# Altium PCB BLDC_4(2).PcbDoc (part 2 of 2)
Units mm, origin at the board's own origin, x right, y up, seen from the top; angles counter-clockwise.
Board outline 48.4 x 75 mm, 4 copper layers (F.Cu, In1.Cu, In2.Cu, B.Cu); 132 components, 115 nets, 434 pads, 199 vias.
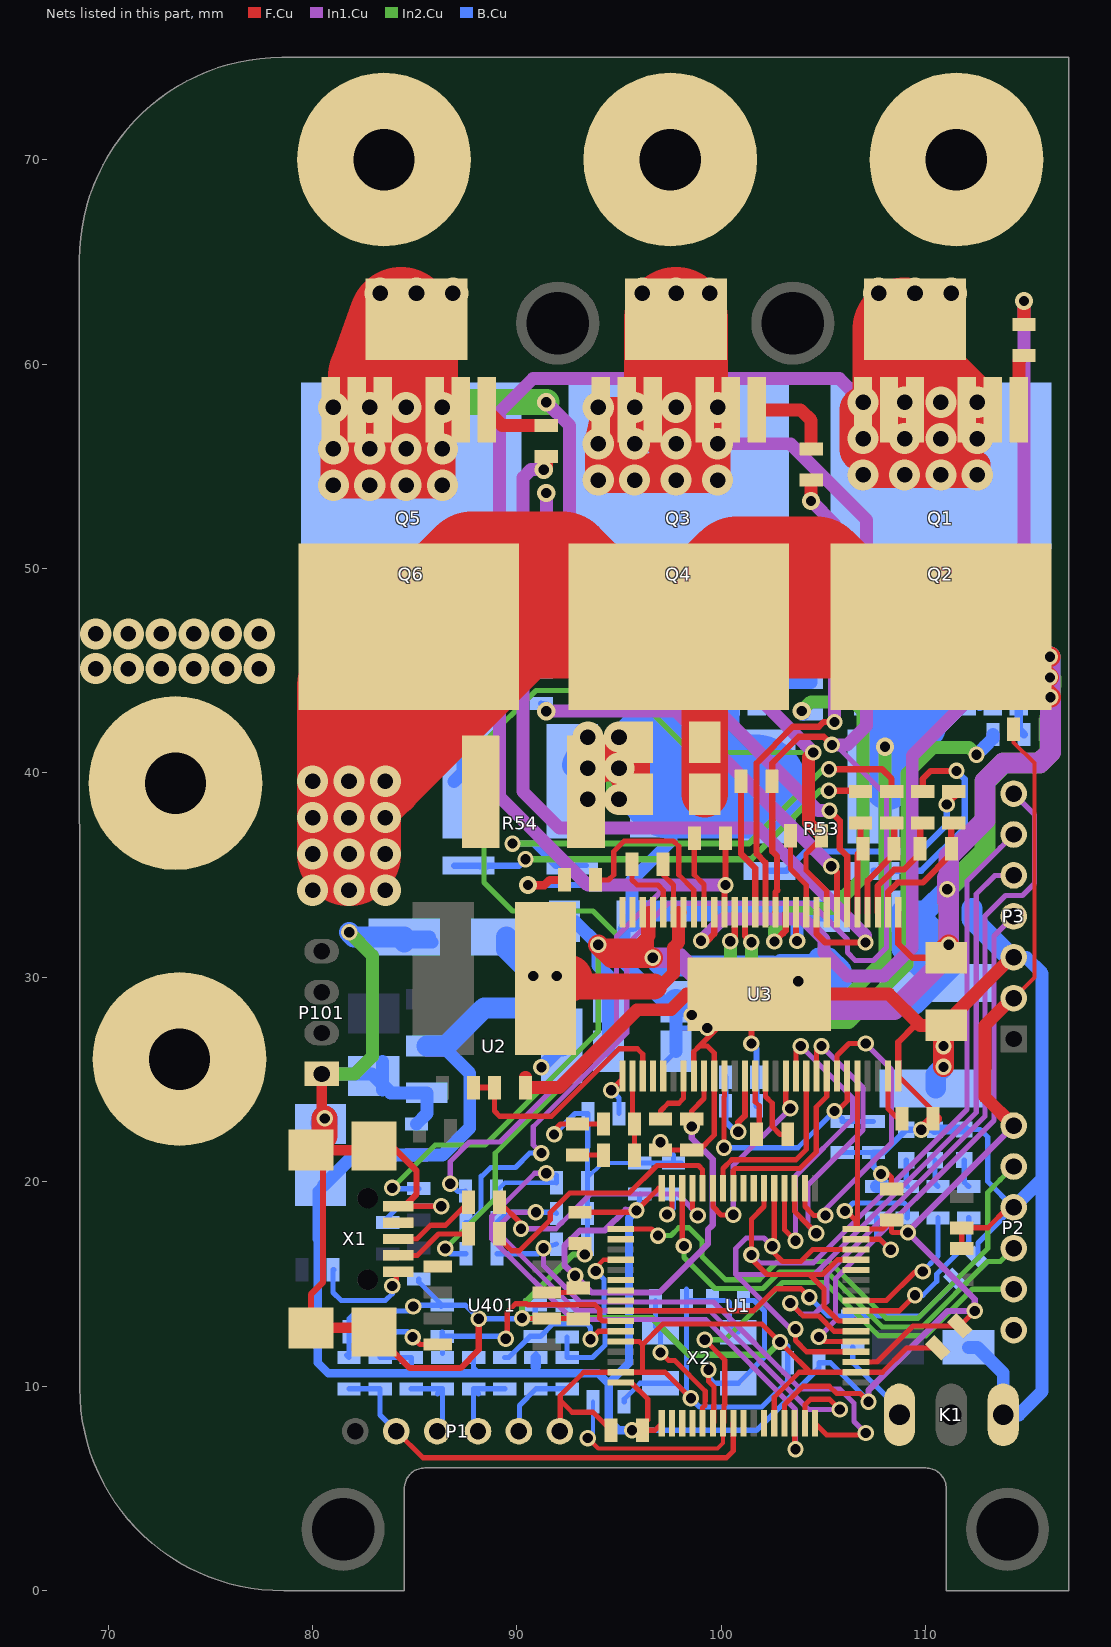
[diagram p4: the nets of this part, all layers, seen from the top]

## Via types
v1: diameter 0.8, hole 0.5, F.Cu to B.Cu, tented both sides, 115 vias
v2: diameter 1.524, hole 0.762, F.Cu to B.Cu, tented both sides, 75 vias
v3: diameter 0.889, hole 0.5, F.Cu to B.Cu, tented both sides, 9 vias

## Nets (pads, with @x,y where several pads share a name; then routed paths per layer and width w, separated by ;. In a path a pad name is that pad's centre, name@x,y a point inside that pad or via, vN(x,y) a via of type N, cw(c..) or ccw(c..) an arc to the next point about the centre after c; other vN are vias at no path point) (continued)
GND: C1.1 C2.1 C3.1 C4.1 C5.2 C6.2 C7.2 C8.1 C9.1 C10.1 C11.1 C12.1 C13.1 C14.1 C15.2 C16.2 C17.2 C18.2 C19.1 C20.1 C21.1 C23.1 C24.2 C25.2 C26.2 C31.1 C32.1 C33.2 C35.1 C37.1 C38.2 C39.1 C40.1 C41.2 C43.2 C44.2 C49.2 C51.1 C52.1 C401.2 D1.2 D2.2 D3.2 D4.1 D5.1 J5.1 K1.3 P1.6 P2.3 P3.3 P5.1 P101.1 Q4.S R2.2 R4.1 R18.2 R20.2 R21.1 R24.1 R25.1 R27.1 R33.1 R53.1 R54.2 R402.2 U1.12 U1.18 U1.60 U1.63 U2.1 U3.8 U3.10 U3.28 U3.39 U3.57 U401.2 X1.5 X2.3 | length 398.8
  F.Cu w0.203: v2(94.996,40.225) 95.758,39.971 95.758,40.098 v2(94.996,41.749)
  F.Cu w0.254: X1.5@84.1,18.8 v1(86.3,18.8) ; v1(90.255,13.329) 90.269,13.315 U401.2@91.467,13.315 92.973,13.315 C401.2@93,13.288 ; U401.2@91.5,13.35 U401.2@91.613,13.237 ; v1(91.823,22.316) 91.823,22.511 92.138,22.826 C21.1@92.964,22.826 C19.1@94.234,22.826 ; P1.6@92.101,7.8 92.123,7.822 92.123,9.316 ; C13.1@93.091,16.984 93.091,16.677 v1(93.321,16.447) ; C35.1@94.615,7.84 93.726,8.729 92.71,8.729 92.123,9.316 ; U1.60@95.087,12.186 95.984,12.186 96.139,12.031 ; v1(97.028,21.937) R20.2@97.028,21.556 C12.1@98.552,21.556 98.933,21.556 99.657,22.28 U3.10@99.657,25.176 99.657,26.293 99.314,26.636 98.933,26.636 ; v1(98.513,9.414) 97.241,10.685 96.063,10.685 ; v1(98.552,28.16) U3.57@101.854,29.176 ; U3.8@98.656,25.176 98.656,26.359 98.933,26.636 ; v1(99.314,27.525) 100.965,29.176 U3.57@101.854,29.176 ; U1.12@102.588,8.186 102.588,9.463 103.81,10.685 104.267,10.685 ; v1(107.817,20.383) 108.171,20.383 108.331,20.223 C10.1@108.331,19.651 ; U3.28@108.656,25.176 110.553,23.278 C23.1@110.553,23.08 ; C11.1@110.586,11.874 110.037,11.874 109.062,11.874 107.874,10.685 U1.18@106.589,10.685 104.267,10.685 ; R2.2@111.76,16.73 C41.2@111.76,17.746 113.03,17.746 114.031,18.747 P2.3@114.3,18.747 P2.3@114.3,18.508 ; 92.123,9.316 92.123,9.54 93.269,10.685 U1.63@95.087,10.685 96.063,10.685 ; 96.063,10.685 96.139,10.761 96.139,12.031 ; 96.139,12.031 97.155,13.047 101.981,13.047 102.47,12.558 v1(102.87,12.158) 103.27,11.758 104.267,10.761 104.267,10.685 ; 98.933,26.636 101.473,29.176 U3.57@101.854,29.176
  F.Cu w0.305: X1.5@79.925,12.85 79.925,14.486 80.518,15.079 80.518,20.957 X1.5@79.925,21.55 ; X1.5@83,12.65 84.762,10.888 87.249,10.888 88.138,11.777 v1(88.138,13.301) ; X1.5@83,21.75 83.88,21.75 85.09,20.54 85.09,19.397 84.493,18.8 X1.5@84.1,18.8 ; v1(101.473,26.763) 101.473,28.795 U3.57@101.854,29.176 ; U3.39@103.657,33.177 103.657,31.831 v1(103.709,31.779) ; U3.28@108.656,25.176 108.656,26.834 109.474,27.652 C39.1@110.998,27.652
  F.Cu w0.406: v3(90.551,34.51) 91.351,34.51 91.605,34.764 R25.1@92.329,34.764
  F.Cu w0.508: X1.5@79.925,13.325 X1.5@79.925,12.85 82.8,12.85 X1.5@83,12.65 ; X1.5@79.925,21.55 82.8,21.55 X1.5@83,21.75 ; P101.1@80.45,25.272 80.45,23.25 v1(80.6,23.1) ; R18.2@90.424,24.604 R18.2@90.424,24.776 ; v1(109.782,22.544) 110.318,23.08 C23.1@110.553,23.08
  F.Cu w0.635: R18.2@90.424,25.112 R18.2@90.424,24.604 92.075,24.604 95.885,28.414 97.536,28.414 98.298,29.176 U3.57@101.854,29.176 ; v1(98.552,28.16) 99.568,29.176 U3.57@101.854,29.176 ; P3.3@114.3,30.97 114.188,30.97 110.998,27.779 C39.1@110.998,27.652 109.728,27.652 108.204,29.176 U3.57@101.854,29.176
  F.Cu w1.016: v1(110.871,25.62) v1(110.871,26.636) 110.871,27.525 C39.1@110.998,27.652 ; C37.1@93.381,39.717 93.381,40.134 v2(94.996,41.749) 95.758,40.098 94.397,40.098 C37.1@93.381,39.717
  F.Cu w1.27: X1.5@79.925,21.55 80.6,22.225 v1(80.6,23.1) ; C37.1@93.381,39.082 93.381,38.793 v2(93.472,38.701) ; v2(93.472,40.225) C37.1@93.84,40.213 ; v2(94.996,38.701) 95.123,38.828 C1.1@95.631,38.828 ; v2(94.996,40.225) C1.1@95.631,38.828 ; C8.1@95.885,41.495 C1.1@95.885,38.955 ; C1.1@95.631,38.828 C1.1@95.885,38.955 ; C1.1@95.631,38.828 C1.1@95.885,38.955
  In1.Cu w1.27: v2(93.472,38.701) v2(93.472,40.225)
  In2.Cu w0.305: v1(93.321,16.447) 92.755,16.447 90.255,13.947 v1(90.255,13.329) 96.619,13.329 98.41,11.539 102.25,11.539 102.47,11.758 v1(102.87,12.158)
  In2.Cu w0.635: P101.1@80.45,25.272 82.075,25.272 82.931,26.128 82.931,31.069 v1(81.8,32.2)
  In2.Cu w1.27: v2(94.996,38.701) v2(94.996,40.225)
  B.Cu w0.203: R33.1@93.462,19.95 93.462,20.204 94.179,20.921 C14.1@96.012,20.921 ; v2(94.996,40.225) 95.25,40.225 v2(94.996,41.749) 95.123,41.714 v2@95.123,42.13
  B.Cu w0.254: C4.1@81.661,11.523 C4.1@81.788,11.396 R402.2@81.788,12.666 81.788,13.301 82.169,13.682 84.715,13.682 v1(84.928,13.896) 84.995,13.962 C7.2@86.35,13.962 ; C2.1@83.7,18.162 83.601,18.162 84.239,18.8 v1(86.3,18.8) ; R4.1@85.2,15.238 85.2,15.112 C7.2@86.35,13.962 ; C7.2@86.284,13.896 C7.2@86.35,13.962 ; v1(90.255,13.329) 90.838,13.329 90.9,13.391 ; v1(91.823,22.316) 92.841,23.334 R21.1@93.472,23.334 R33.1@93.462,19.95 R27.1@93.462,18.45 R24.1@93.462,16.95 93.491,16.921 93.491,16.617 v1(93.321,16.447) ; C5.2@92.456,13.936 92.43,13.962 C6.2@90.9,13.962 90.9,13.391 ; Q4.S@94.107,44.414 Q4.S@95.377,44.414 95.374,44.416 Q4.S@95.377,44.416 ; C32.1@95.25,9.237 95.25,9.364 96.032,10.147 X2.3@97.033,10.147 97.78,10.147 v1(98.513,9.414) ; C14.1@96.012,20.921 C17.2@97.663,20.921 ; v1(97.028,21.937) 97.663,21.302 C17.2@97.663,20.921 ; C49.2@97.155,25.747 C49.2@97.79,26.382 ; 97.79,27.525 v1(99.314,27.525) ; C17.2@98.044,20.921 C17.2@97.663,20.921 ; C15.2@98.298,14.748 C15.2@98.298,14.19 ; X2.3@100.833,12.646 100.4,13.079 100.4,14.1 100.31,14.19 C38.2@99.568,14.19 C15.2@98.298,14.19 ; C9.1@102.549,28.7 C9.1@102.549,28.799 ; v1(102.87,12.158) 103.06,12.158 103.251,11.968 C31.1@103.251,11.142 103.251,10.253 101.981,8.983 98.933,8.983 98.298,9.618 C15.2@98.298,14.19 ; C20.1@105.918,21.429 C52.1@107.442,21.429 ; D1.2@111.887,22.56 112.662,22.56 113.03,22.191 113.03,20.017 P2.3@114.3,18.747 112.553,17 C3.1@112.553,16.253 ; C7.2@86.35,13.962 87.477,13.962 v1(88.138,13.301) 90.81,13.301 90.9,13.391
  B.Cu w0.305: v3(90.551,34.51) 91.18,34.51 95.377,34.51 95.631,34.256 ; v1(101.473,26.763) 101.727,26.509 C26.2@101.727,25.112 C18.2@101.727,23.715 ; v1(107.817,20.383) 107.442,20.758 C52.1@107.442,21.429 107.93,21.429 D3.2@109.05,22.55 v1(109.782,22.544) 110.44,22.54 D2.2@110.45,22.55
  B.Cu w0.508: v2@95.123,42.13 95.377,40.594 v2@95.136,40.352 ; D2.2@110.45,22.55 D1.2@111.887,22.56
  B.Cu w0.635: P101.1@80.45,25.272 82.904,25.272 C33.2@83,25.176 83.826,24.35 U2.1@85.598,24.35 85.598,23.334 C24.2@85.09,22.826 ; C33.2@83.439,24.5 C33.2@83.439,25.874 ; D4.1@84.496,31.716 D4.1@85.852,31.716 ; D4.1@84.496,31.97 D4.1@85.725,31.97 ; P5.1@97.742,39.336 P5.1@97.536,39.336 97.536,36.669 95.631,34.764 95.631,34.256 C43.2@95.631,32.732 95.25,32.351 95.25,30.7 97.155,28.795 C44.2@97.79,28.795 ; C49.2@97.79,26.382 97.79,27.525 C44.2@97.79,28.795 ; v1(98.552,28.16) 97.917,28.795 C44.2@97.79,28.795 ; Q4.S@99.187,44.414 Q4.S@100.457,44.414 ; 103.124,33.24 103.709,32.655 103.709,32.344 v1(103.709,31.779) ; C16.2@107.6,19.762 107.762,19.762 107.817,19.818 v1(107.817,20.383) ; D5.1@112.093,11.904 112.522,11.904 113.792,10.634 K1.3@113.792,8.602 114.554,8.602 115.697,9.745 115.697,20.144 ; P2.3@114.3,18.747 115.697,20.144 ; P3.3@114.3,30.97 114.92,30.97 115.697,30.192 115.697,20.144
  B.Cu w0.889: Q4.S@100.457,44.414 100.457,41.241 R53.1@102.362,39.336 R53.1@102.362,40.347
  B.Cu w1.016: v1(81.8,32.2) 82.03,31.97 D4.1@84.496,31.97 ; D4.1@84.496,31.716 D4.1@84.496,31.757 ; C43.2@95.631,32.732 96.139,33.24 103.124,33.24 C40.1@105.537,33.24 ; Q4.S@96.647,44.414 96.647,43.527 99.187,40.987 P5.1@97.536,39.336 P5.1@98.361,38.511 ; C51.1@110.49,24.569 110.49,25.239 v1(110.871,25.62) v1(110.871,26.636) ; 112.268,33.367 112.268,32.859 114.158,30.97 P3.3@114.3,30.97
  B.Cu w1.27: C25.2@80.55,22.874 80.6,22.924 v1(80.6,23.1) ; R54.2@92.832,40.393 v2(93.472,41.749) ; C44.2@97.79,28.795 97.885,28.7 C9.1@102.549,28.7
  B.Cu w2.286: P5.1@97.536,39.336 99.187,40.987 Q4.S@99.187,44.414
  B.Cu w5.08: P5.1@97.028,40.987 P5.1@97.536,39.336 R53.1@101.663,39.336
  other v1: 103.759,29.811
H1: U1.43 U3.17 | length 10.1
  F.Cu w0.254: U1.43@99.588,19.687 99.588,18.783 99.99,18.381 100.018,18.381 v1(100.584,18.381) ; U3.17@103.157,25.176 103.157,23.809 v1(103.378,23.588)
  In1.Cu w0.254: v1(100.584,18.381) 100.584,18.947 100.584,20.794 v1(103.378,23.588)
H1_LOW: Q2.S R30.1 R36.1 R53.2 U3.44 | length 48.5
  F.Cu w0.305: U3.44@101.158,33.177 101.158,32.031 v1(101.473,31.716)
  In2.Cu w0.635: v1(101.473,31.716) 101.473,30.065 102.87,28.668 105.791,28.668 108.003,30.881 108.003,41.188 v3(108.003,41.275)
  B.Cu w0.254: R36.1@104.394,46.956 R30.1@104.394,48.099
  B.Cu w0.305: R36.1@104.394,46.956 105.41,46.956 106.934,45.432 Q2.S@106.934,44.414 ; R53.2@108.14,39.336 R53.2@108.267,39.463
  B.Cu w0.508: Q2.S@112.014,44.414 112.649,43.779 112.649,43.273 113.284,43.908 Q2.S@113.284,44.414
  B.Cu w0.635: v3(108.003,41.275) 108.003,40.647 108.003,39.473 R53.2@108.14,39.336 ; Q2.S@113.284,43.654 Q2.S@113.284,44.414
  B.Cu w1.27: R53.2@108.14,39.336 108.14,40.543 109.855,42.257
  B.Cu w2.286: R53.2@108.14,39.336 108.14,44.35 Q2.S@108.204,44.414 Q2.S@109.474,44.414 Q2.S@112.014,44.414 111.751,44.414 109.855,42.518 109.855,42.257
H1_VS: C28.1 J3.1 P9.1 Q1.S Q2.D R32.1 U3.46 | length 150.6
  F.Cu w0.203: v2(107.696,63.466) 108.966,62.196 P9.1@109.474,62.196 ; v2(109.474,63.466) v2(111.252,63.466)
  F.Cu w0.254: Q1.S@109.474,57.754 P9.1@109.474,62.196
  F.Cu w0.305: U3.46@100.157,33.177 100.157,34.465 v1(100.203,34.51) C28.1@100.203,36.796
  F.Cu w0.635: v2(106.934,54.576) 106.68,54.83 Q1.S@106.68,57.5 ; v2(106.934,56.354) 106.934,57.37 Q1.S@106.68,57.5 ; Q1.S@106.934,57.754 Q1.S@106.68,57.5 ; v2(106.934,58.132) 108.712,58.386 v2(108.966,58.132) ; v2(108.966,56.354) 110.49,56.1 v2(110.744,56.354) ; v2(110.744,58.132) 111.506,57.624 112.014,57.624 v2(112.522,58.132) ; v2(112.522,54.576) v2(112.522,56.354) 113.03,56.862 Q1.S@113.284,57.754 113.284,57.624 108.717,57.624 108.588,57.754 Q1.S@108.204,57.754 ; Q1.S@106.68,57.5 107.312,57.5 Q1.S@107.95,57.37 ; Q1.S@107.95,57.37 108.204,57.624 Q1.S@108.204,57.754 ; Q1.S@107.95,57.37 Q1.S@108.204,57.754
  F.Cu w1.27: v2(106.934,54.576) v2(108.966,54.576) v2(110.744,54.576) ; v2(112.522,56.354) 110.744,55.084 v2(110.744,54.576) ; v2(110.744,54.576) 111.252,55.084 112.522,55.084 v2(112.522,54.576) v2(110.744,54.576)
  F.Cu w2.286: Q1.S@106.934,57.754 106.934,55.846 107.696,55.084 109.474,55.592 112.014,57.624 Q1.S@112.014,57.754 ; v2@108.717,57.624 111.884,57.624 Q1.S@112.014,57.754 ; P9.1@109.474,62.196 108.966,61.688 112.014,58.64 Q1.S@112.014,57.754
  F.Cu w5.08: v2(108.966,58.132) P9.1@108.966,61.688
  In1.Cu w0.254: v1(86.741,19.905) 86.741,20.995 87.684,21.938 89.179,21.938 94.869,27.628 94.869,32.004 97.375,34.51
  In1.Cu w0.635: 98.367,34.51 99.637,34.51 v1(100.203,34.51) ; 98.679,34.51 97.375,34.51 93.472,34.51 89.154,38.828 89.154,57.654 90.79,59.29 105.776,59.29 v2(106.934,58.132)
  B.Cu w0.203: v2(107.696,63.466) v2(109.474,63.466)
  B.Cu w0.254: v1(86.741,19.905) 87.122,19.524 R32.1@87.488,19.55
  B.Cu w0.635: v2(106.934,54.576) v2(108.966,54.576) ; v2(106.934,56.354) 106.68,57.878 v2(106.934,58.132) ; v2(108.966,56.354) 109.22,56.608 v2(108.966,58.132) ; v2(110.744,54.576) v2(112.522,54.576) ; v2(110.744,56.354) v2(110.744,58.132) ; v2(112.522,56.354) 112.268,56.608 v2(112.522,58.132)
H2: U1.42 U3.19 | length 9
  F.Cu w0.254: U1.42@100.089,19.687 100.089,20.648 100.514,21.074 103.657,21.074 104.158,21.574 104.158,24.171 U3.19@104.158,25.176
H2_VS: C29.1 J2.1 P7.1 Q3.S Q4.D R26.1 U3.41 | length 145
  F.Cu w0.203: v2(96.139,63.466) v2(97.79,63.466) ; P7.1@97.79,62.196 98.171,62.196 v2(99.441,63.466)
  F.Cu w0.305: U3.41@102.639,33.195 U3.41@102.657,33.177 102.657,34.171 102.743,34.258 102.73,34.27 102.73,35.92 102.489,36.161 C29.1@102.489,39.59 102.489,40.467 103.791,41.768 105.01,41.768 v1(105.41,41.368)
  F.Cu w0.508: Q3.S@99.187,57.754 Q3.S@100.457,57.754
  F.Cu w0.635: v2(93.98,56.1) v2(95.758,56.1) ; Q3.S@93.98,56.354 93.726,56.608 v2(93.98,57.878) ; v2(95.758,57.878) v2(97.79,57.878) ; v2(97.79,54.322) 98.044,54.068 v2(99.822,54.322) ; v2(97.79,56.1) v2(99.822,56.1) ; v2(99.822,57.878) 100.333,57.878 Q3.S@100.457,57.754
  F.Cu w1.27: Q3.S@94.107,57.754 Q3.S@95.377,57.754 ; Q3.S@96.647,57.754 Q3.S@95.377,57.754 ; v2(97.79,56.1) 96.012,54.322 v2(95.758,54.322) ; v2(99.822,57.878) v2(99.822,56.1) ; v2(93.98,54.322) v2(93.98,56.1) 93.98,56.357 Q3.S@95.377,57.754 ; v2(93.98,54.322) v2(95.758,56.1) v2(95.758,54.322) ; v2(93.98,54.322) v2(95.758,54.322) ; v2(95.758,54.322) v2(97.79,54.322) ; v2(97.79,54.322) 99.568,56.1 v2(99.822,56.1) ; v2(97.79,54.322) v2(99.822,54.322) v2(99.822,56.1)
  F.Cu w5.08: v2(97.79,57.878) P7.1@97.79,62.196
  In1.Cu w0.254: v1(91.2,21.4) 90.8,21.8 90.8,22.694 95.377,27.271 95.377,31.589 97.396,33.609 104.407,33.609 106.172,31.843 106.172,31.208 106.553,30.827 107.442,30.827 108.077,31.462 108.077,38.885 105.994,40.968 v1@105.594,41.368
  In1.Cu w0.635: v2(99.822,56.1) 103.378,56.1 107.1,52.378 107.1,42.309 106.16,41.368 ; v1(105.41,41.368) 106.16,41.368 ; v1@105.594,41.368 106.16,41.368
  B.Cu w0.203: v2(97.79,63.466) v2(99.441,63.466)
  B.Cu w0.254: R26.1@87.503,18 87.7,18 88.25,18.55 88.25,20.267 88.291,20.267 88.724,20.7 89.934,20.7 90.634,21.4 v1(91.2,21.4)
  B.Cu w0.635: v2(93.98,54.322) 97.917,54.762 95.054,57.878 v2(93.98,57.878) ; v2(93.98,56.1) 94.234,57.878 v2(95.758,57.878) ; v2(95.758,54.322) 96.012,54.576 v2(97.79,54.322) ; v2(95.758,56.1) v2(97.79,56.1) ; v2(97.79,57.878) v2(99.822,57.878) ; v2(99.822,54.322) v2(99.822,56.1)
H3: U1.41 U3.21 | length 9.2
  F.Cu w0.254: U1.41@100.589,19.687 100.589,20.538 100.693,20.642 103.836,20.642 104.648,21.454 104.648,23.661 105.159,24.171 U3.21@105.159,25.176
H3_LOW: Q6.S R46.1 R54.1 U3.34 | length 53.5
  F.Cu w0.305: v1(105.291,38.154) 105.691,37.754 105.791,37.654 105.791,36.296 106.157,35.93 U3.34@106.157,33.177
  In1.Cu w0.635: v3(91.44,53.687) 91.44,46.575 93.535,44.48 98.4,44.48 104.726,38.154 v1(105.291,38.154)
  B.Cu w0.305: Q6.S@87.376,44.414 87.376,47.083 88.011,47.718 R46.1@91.186,47.718
  B.Cu w0.635: R54.1@86.931,39.59 87.376,40.035 Q6.S@87.376,44.414 87.376,48.099 88.519,49.242 90.17,49.242 91.44,50.512 v3(91.44,53.687)
H3_VS: C30.1 J1.1 P6.1 Q5.S Q6.D R23.1 U3.36 | length 166.9
  F.Cu w0.203: v2(83.312,63.466) v2(85.09,63.466) ; v2(86.868,63.466) P6.1@87.376,63.466
  F.Cu w0.254: C30.1@104.902,36.923 104.902,36.796 104.14,36.034 104.14,35.239 105.159,34.22 U3.36@105.159,33.177
  F.Cu w0.508: Q5.S@80.899,57.754 Q5.S@82.169,57.754 85.725,57.754 Q5.S@86.995,57.754 ; v2(81.026,57.878) v2(82.804,57.878) ; v2(84.582,54.068) 84.836,54.322 v2(86.36,54.068) ; v2(84.582,57.878) v2(86.36,57.878)
  F.Cu w0.635: v1(104.5,41) 104.267,40.767 104.267,37.558 C30.1@104.902,36.923
  F.Cu w1.27: v2(84.582,57.878) 85.087,57.373 86.36,57.373 Q5.S@85.979,57.754 ; v2(81.026,55.846) v2(82.804,54.068) ; v2(81.026,55.846) v2(82.804,55.846) ; v2(81.026,55.846) v2(81.026,54.068) v2(82.804,54.068) ; v2(82.804,54.068) v2(82.804,55.846) ; v2(82.804,54.068) v2(84.582,54.068) ; v2(82.804,55.846) v2(84.582,54.068) ; v2(84.582,54.068) v2(86.36,54.068) ; v2(84.582,54.068) v2(84.582,55.846) ; v2(84.582,55.846) v2(86.36,55.846) ; v2(84.582,55.846) 86.36,57.624 v2(86.36,57.878) v2(86.36,55.846) ; v2(84.582,55.846) v2(86.36,54.068) ; v2(86.36,54.068) v2(86.36,55.846)
  F.Cu w2.286: P6.1@85.09,62.196 85.979,61.307 Q5.S@85.979,57.754
  F.Cu w5.08: Q5.S@83.185,57.754 83.312,57.878 83.312,59.402 P6.1@84.328,62.196
  In1.Cu w0.635: v3(91.44,58.132) 92.583,56.989 92.583,47.083 94.107,45.559 99.941,45.559 104.1,41.4 v1(104.5,41)
  In2.Cu w0.254: v1(86.5,16.733) 88.943,19.176 88.943,21.394 94.869,27.319 94.869,32.097 93.726,33.24 89.789,33.24 88.392,34.637 88.392,41.495 90.932,44.035 95.504,44.035 98.539,41 v1(104.5,41)
  In2.Cu w1.27: v2(86.36,57.878) 86.614,58.132 v3(91.44,58.132)
  B.Cu w0.203: v2(85.09,63.466) v2(86.868,63.466)
  B.Cu w0.254: v1(86.5,16.733) 86.757,16.476 R23.1@87.503,16.476
  B.Cu w0.508: v2(81.026,54.068) 80.772,55.084 81.026,55.338 Q6.D@84.836,55.016 86.614,56.794 v2(86.36,57.878) ; v2(81.026,55.846) v2(81.026,57.878) ; v2(82.804,54.068) 83.058,53.814 v2(84.582,54.068) ; v2(82.804,55.846) v2(84.582,55.846) ; v2(82.804,57.878) v2(84.582,57.878) ; v2(86.36,54.068) v2(86.36,55.846)
HALL1_IN: P1.3 R8.1 R13.1 | length 4
  B.Cu w0.254: R13.1@84.836,9.872 R8.1@86.36,9.872 ; P1.3@86.099,7.8 86.36,8.061 R8.1@86.36,9.872 ; R8.1@86.121,9.634 R8.1@86.36,9.872
HALL1_OUT: C7.1 R8.2 U1.58 | length 11.9
  F.Cu w0.254: v1(89.453,12.323) 89.529,12.398 89.529,13.624 89.941,14.036 90.468,14.036 90.523,13.981 93.82,13.981 94.05,13.75 94.05,13.32 94.183,13.187 U1.58@95.087,13.187
  B.Cu w0.254: C7.1@86.35,12.438 89.338,12.438 v1(89.453,12.323) ; C7.1@86.35,12.638 R8.2@86.36,11.596
HALL2_IN: P1.4 R9.1 R12.1 | length 4
  B.Cu w0.254: P1.4@88.101,7.8 87.884,8.017 R12.1@87.884,9.872 ; R12.1@88.123,9.634 R12.1@87.884,9.872 ; R9.1@89.408,9.872 R12.1@87.884,9.872
HALL2_OUT: C6.1 R9.2 U1.59 | length 7.4
  F.Cu w0.254: v1(93.605,12.3) 93.992,12.687 U1.59@95.087,12.687
  B.Cu w0.254: R9.2@89.408,11.396 89.604,11.396 90.646,12.438 C6.1@90.9,12.438 91.154,12.438 91.766,13.05 93.421,13.05 ; v1(93.605,12.3) 93.605,12.866 ; 93.421,13.05 93.605,12.866 ; 93.421,13.05 93.605,12.866
HALL3_IN: P1.5 R10.1 R11.1 | length 3.9
  B.Cu w0.254: P1.5@90.1,7.8 90.122,9.062 R11.1@90.932,9.872 R10.1@92.456,9.872
HALL3_OUT: C5.1 R10.2 U1.52 | length 8.5
  F.Cu w0.203: v1(93.859,15.631) 93.859,15.812 94.234,16.187 U1.52@95.087,16.187
  B.Cu w0.254: C5.1@92.456,12.412 R10.2@92.456,11.396 93.707,11.396 94.31,12 94.31,12.639 94.259,12.689 94.259,15.231 v1(93.859,15.631)
L1: U1.36 U3.18 | length 16.1
  F.Cu w0.254: U1.36@103.088,19.687 103.088,17.655 v1(103.632,17.111) ; U3.18@103.657,25.176 103.657,26.408 v1(103.886,26.636)
  In1.Cu w0.254: v1(103.632,17.111) 103.632,20.286 106.426,23.08 106.426,24.096 104.286,26.236 v1(103.886,26.636)
L2: U1.35 U3.20 | length 15.5
  F.Cu w0.254: U1.35@103.589,19.687 103.589,18.538 104.243,17.884 v1(104.643,17.484) ; U3.20@104.658,25.176 104.658,26.393 v1(104.902,26.636)
  In1.Cu w0.254: v1(104.643,17.484) 104.243,17.884 104.243,19.846 106.934,22.537 106.934,24.604 v1(104.902,26.636)
L3: U1.34 U3.22 | length 15
  F.Cu w0.254: U1.34@104.089,19.687 104.089,18.783 104.519,18.353 104.525,18.353 v1(105.091,18.353) ; U3.22@105.656,25.176 105.656,26.18 106.239,26.763 106.495,26.763 v1(107.061,26.763)
  In1.Cu w0.254: v1(105.091,18.353) 105.091,18.654 108.331,21.894 108.331,25.493 v1(107.061,26.763)
LED_GREEN: R37.2 U1.24 | length 8.3
  F.Cu w0.254: U1.24@106.589,13.687 108.717,13.687 109.074,14.044 v1(109.474,14.444)
  B.Cu w0.254: v1(109.474,14.444) 109.855,14.444 110.542,15.131 110.542,15.481 112.1,17.04 R37.2@112.1,18.238
LED_RED: R38.2 U1.25 | length 6.8
  F.Cu w0.254: U1.25@106.589,14.185 108.072,14.185 109.474,15.587 109.824,15.587 v1(109.849,15.612)
  B.Cu w0.254: v1(109.849,15.612) 110.249,16.012 110.6,16.363 R38.2@110.6,18.238
M_H1: R28.2 U3.47 | length 49.8
  F.Cu w0.305: v1(99.012,31.789) 99.324,31.789 99.657,32.121 U3.47@99.657,33.177
  F.Cu w0.635: R28.2@114.808,61.942 v3(114.808,63.085)
  In1.Cu w0.635: v1(99.012,31.789) 100.083,32.859 104.013,32.859 105.029,31.843 105.029,31.208 106.172,30.065 107.95,30.065 109.341,31.456 109.341,40.833 114.808,46.3 114.808,62.457 v3(114.808,63.085)
M_H2: R34.2 U3.42 | length 24.4
  F.Cu w0.305: U3.42@102.156,33.177 102.156,35.605 101.727,36.034 101.727,40.479 103.505,42.257 104.775,42.257 105.011,42.493 v1(105.538,42.493)
  F.Cu w0.635: v3(104.394,53.306) R34.2@104.394,54.322
  In1.Cu w0.635: v3(104.394,53.306) 105.538,52.163 105.538,43.059 v1(105.538,42.493)
M_H3: R42.2 U3.37 | length 40.9
  F.Cu w0.305: U3.37@104.658,33.177 104.658,32.121 105.073,31.707 106.486,31.707 v1(107.051,31.707)
  F.Cu w0.635: v3(91.313,54.83) 91.44,54.957 R42.2@91.44,55.465
  In1.Cu w0.635: v3(91.313,54.83) 90.684,54.83 90.297,54.443 90.297,39.082 92.075,37.304 101.799,37.304 107.051,32.052 v1(107.051,31.707)
M_L1: R29.2 U3.45 | length 28.9
  F.Cu w0.305: v1(100.442,31.765) 100.658,31.981 U3.45@100.658,33.177
  In2.Cu w0.635: v1(100.442,31.765) 100.442,29.659 102.321,27.779 106.244,27.779 109.093,30.628 109.093,39.971 110.363,41.241 112.125,41.241 v1(112.483,40.884)
  B.Cu w0.635: v1(112.483,40.884) 112.883,41.284 113.284,41.684 R29.2@113.284,41.876
M_L2: R35.2 U3.40 | length 19.3
  F.Cu w0.305: v1(102.597,31.755) 102.997,32.155 103.037,32.155 103.157,32.275 U3.40@103.157,33.177
  In2.Cu w0.635: v1(102.597,31.755) 102.597,32.321 103.643,33.367 105.41,33.367 106.934,34.891 106.934,43.019 106.477,43.477 104.382,43.477 v3(103.938,43.032)
  B.Cu w0.635: v3(103.938,43.032) 103.938,42.968 R35.2@104.013,42.892
M_L3: R43.2 U3.35 | length 20
  F.Cu w0.305: v1(105.383,35.431) 105.656,35.158 U3.35@105.656,33.177
  In1.Cu w0.635: v3(91.44,43.019) 97.795,43.019 104.983,35.831 v1(105.383,35.431)
  B.Cu w0.305: R43.2@91.186,43.4 91.44,43.345 v3(91.44,43.019)
MISO_RX_SCL: P3.7 U1.22 | length 36
  F.Cu w0.254: v1(103.378,14.063) 103.778,13.663 104.013,13.428 104.775,13.428 105.517,12.687 U1.22@106.589,12.687
  In1.Cu w0.254: v1(103.378,14.063) 103.778,13.663 103.905,13.536 104.56,13.536 105.156,14.133 105.156,15.46 112.903,23.207 112.903,33 113.905,34.002 114.73,34.002 115.316,34.588 115.316,37.97 P3.7@114.3,38.986
Net-(C21-Pad2): C21.2 R19.1 | length 1.3
  F.Cu w0.254: C21.2@92.964,21.302 R19.1@94.234,21.302
Net-(D1-A): D1.1 R37.1 | length 1.4
  B.Cu w0.254: D1.1@111.887,21.061 111.887,19.975 R37.1@112.1,19.762
Net-(D2-A): D2.1 R38.1 | length 1.4
  B.Cu w0.254: D2.1@110.45,21.051 110.45,19.912 R38.1@110.6,19.762
Net-(D3-A): D3.1 R22.1 | length 1.3
  B.Cu w0.254: D3.1@109.05,21.051 109.05,19.812 R22.1@109.1,19.762
Net-(D4-K): C27.1 D4.2 L1.1 U3.50 U3.51 | length 18.9
  F.Cu w0.254: C27.1@97.155,35.526 97.155,35.018 97.658,34.515 U3.51@97.658,33.177
  F.Cu w0.305: U3.51@97.658,33.177 97.917,33.177 U3.50@98.158,33.177
  F.Cu w0.635: L1.1@91.399,29.938 L1.1@91.399,29.979 ; 96.709,29.557 97.028,29.557 97.663,30.192 97.663,31.462 97.917,31.716 97.917,33.177
  F.Cu w1.016: v1(90.805,30.065) 90.932,29.938 L1.1@91.399,29.938 91.821,29.938 v1(91.948,30.065)
  F.Cu w1.27: L1.1@91.399,29.938 92.562,29.938 92.943,29.557 96.709,29.557
  F.Cu w2.286: L1.1@91.399,29.938 L1.1@92.562,29.938
  B.Cu w1.016: D4.2@89.494,31.97 89.494,31.376 v1(90.805,30.065) v1(91.948,30.065)
Net-(K1-P1): K1.1 R5.2 | length 4.2
  B.Cu w0.254: R5.2@106.426,11.904 106.426,11.142 108.712,8.856 K1.1@108.712,8.602
Net-(Q1-PadG): Q1.G R28.1 | length 2.8
  F.Cu w0.635: Q1.G@114.554,57.754 114.554,60.164 R28.1@114.808,60.418
Net-(Q2-PadG): Q2.G R29.1 R30.2 | length 16.2
  B.Cu w0.254: R30.2@104.394,49.623 111.379,49.623 114.554,46.448 Q2.G@114.554,44.414
  B.Cu w0.406: Q2.G@114.554,44.414 114.554,42.13 R29.1@114.808,41.876
Net-(Q3-PadG): Q3.G R34.1 | length 4.3
  F.Cu w0.635: Q3.G@101.727,57.754 103.883,57.754 104.394,57.243 R34.1@104.394,55.846
Net-(Q4-PadG): Q4.G R35.1 R36.2 | length 3.7
  B.Cu w0.635: Q4.G@101.727,44.414 101.73,44.416 R35.1@104.394,44.416 R36.2@104.394,45.432
Net-(Q5-PadG): Q5.G R42.1 | length 3.2
  F.Cu w0.635: Q5.G@88.519,57.754 89.284,56.989 R42.1@91.44,56.989
Net-(Q6-PadG): Q6.G R43.1 R46.2 | length 4
  B.Cu w0.305: R43.1@91.186,44.924 R46.2@91.186,46.194
  B.Cu w0.635: Q6.G@88.646,44.414 89.157,44.924 R43.1@91.186,44.924
Net-(R6-Pad1): R6.1 X1.1 | length 5.5
  F.Cu w0.254: v1(83.9,14.9) 84.1,15.1 X1.1@84.1,15.6
  B.Cu w0.254: R6.1@81.05,15.7 R6.1@81.012,15.7 81.012,14.585 81.407,14.19 83.566,14.19 83.9,14.524 v1(83.9,14.9)
Net-(R103-Pad2): R103.2 X1.2 | length 4
  F.Cu w0.254: X1.2@84.1,16.4 85.124,16.4 86.162,17.438 87.054,17.438 87.067,17.45 R103.2@87.638,17.45
Net-(R104-Pad2): R104.2 X1.3 | length 4.3
  F.Cu w0.254: X1.3@84.1,17.2 85.104,17.2 85.773,17.869 86.507,17.869 R104.2@87.638,19
Net-(U1-PH0-OSC_IN): C15.1 U1.5 X2.1 | length 7.2
  F.Cu w0.254: v1(97.028,11.65) 97.428,11.25 97.719,11.25 99.217,9.752 99.217,9.274 99.202,9.259 99.202,9.06 99.088,8.946 U1.5@99.088,8.186
  B.Cu w0.254: C15.1@96.774,14.19 96.774,12.905 X2.1@97.033,12.646 97.028,12.641 v1(97.028,11.65)
Net-(U1-PH1-OSC_OUT): C38.1 U1.6 X2.2 | length 10
  F.Cu w0.254: v1(99.375,10.808) 99.375,10.243 99.649,9.968 99.649,9.095 99.634,9.08 99.634,8.231 U1.6@99.588,8.186
  B.Cu w0.254: v1(99.375,10.808) 99.375,10.45 99.678,10.147 X2.2@100.833,10.147 102.108,11.422 102.108,13.682 101.6,14.19 C38.1@101.092,14.19
Net-(U1-VCAP1): C16.1 U1.31 | length 3.8
  F.Cu w0.254: U1.31@106.589,17.188 107.769,17.188 107.887,17.07 v1(108.287,16.67)
  B.Cu w0.254: C16.1@107.6,18.238 107.6,17.357 107.887,17.07 v1(108.287,16.67)
Net-(U1-VCAP2): C17.1 U1.47 | length 2.5
  F.Cu w0.254: v1(97.35,18.4) 97.587,18.686 U1.47@97.587,19.687
  B.Cu w0.254: v1(97.35,18.4) 97.663,18.713 C17.1@97.663,19.397
Net-(U3-AVDD): C23.2 U3.27 | length 2.3
  F.Cu w0.254: U3.27@108.158,25.176 108.158,23.571 C23.2@108.648,23.08
Net-(U3-BIAS): R25.2 U3.49 | length 9.2
  F.Cu w0.254: R25.2@93.853,34.764 94.488,34.764 94.742,35.018 94.742,36.161 95.25,36.669 97.663,36.669 97.917,36.415 97.917,35.018 98.656,34.279 U3.49@98.656,33.177
Net-(U3-BST_A): C28.2 U3.48 | length 3.8
  F.Cu w0.254: C28.2@98.679,36.796 98.679,35.018 99.157,34.541 U3.48@99.157,33.177
Net-(U3-BST_B): C29.2 U3.43 | length 6.7
  F.Cu w0.305: C29.2@100.965,39.59 100.965,36.034 101.658,35.341 U3.43@101.658,33.177
Net-(U3-BST_BK): C27.2 U3.52 | length 3.6
  F.Cu w0.254: C27.2@95.631,35.526 95.631,34.764 95.885,34.51 96.901,34.51 97.158,34.254 U3.52@97.158,33.177
Net-(U3-BST_C): C30.2 U3.38 | length 4.1
  F.Cu w0.254: C30.2@103.378,36.923 103.378,36.098 103.378,35.295 104.158,34.516 U3.38@104.158,33.177
Net-(U3-COMP): C19.2 R19.2 U3.2 | length 3.9
  F.Cu w0.254: U3.2@95.656,25.176 95.656,22.928 C19.2@95.758,22.826 R19.2@95.758,21.302
Net-(U3-CP1): C22.1 U3.14 | length 3
  F.Cu w0.254: U3.14@101.658,25.176 101.658,23.911 101.854,23.715 101.854,22.445 C22.1@101.727,22.318
Net-(U3-CP2): C22.2 U3.15 | length 3.5
  F.Cu w0.254: U3.15@102.156,25.176 102.156,24.175 102.489,23.842 102.489,22.699 102.87,22.318 C22.2@103.251,22.318
Net-(U3-DTC): R20.1 U3.7 | length 2.9
  F.Cu w0.254: R20.1@97.028,23.08 97.028,23.461 97.409,23.842 97.917,23.842 98.158,24.084 U3.7@98.158,25.176
Net-(U3-DVDD): C20.2 C52.2 U3.11 U3.23 | length 13.9
  F.Cu w0.254: v1(100.132,21.666) 100.132,22.232 100.127,22.237 100.127,24.141 100.157,24.171 U3.11@100.157,25.176 ; v1(105.537,23.461) 105.664,23.461 106.157,23.954 U3.23@106.157,25.176
  B.Cu w0.254: v1(100.132,21.666) 100.698,21.666 103.742,21.666 v1(105.537,23.461) 105.918,23.08 C20.2@105.918,22.953 C52.2@107.442,22.953
Net-(U3-GVDD): C18.1 C26.1 U3.13 | length 5.9
  F.Cu w0.305: v1(100.832,22.445) 100.832,22.906 101.158,23.233 U3.13@101.158,25.176
  B.Cu w0.305: C26.1@100.203,25.112 C18.1@100.203,23.715 100.203,22.953 100.711,22.445 v1(100.832,22.445)
Net-(U3-RT_CLK): R21.2 U3.1 | length 2.2
  F.Cu w0.254: v1(94.615,24.477) 95.159,25.021 U3.1@95.159,25.176
  B.Cu w0.254: v1(94.615,24.477) 94.996,24.096 R21.2@94.996,23.334
Net-(U3-SN1): C34.1 R48.2 U3.33 | length 4.5
  F.Cu w0.305: U3.33@106.657,33.177 106.657,36.011 C34.1@106.934,36.288 106.807,36.415 R48.2@106.807,37.558
Net-(U3-SN2): C36.1 R50.2 U3.31 | length 5.6
  F.Cu w0.305: U3.31@107.658,33.177 107.658,34.472 108.458,35.272 108.925,35.272 109.728,36.075 C36.1@109.728,36.288 109.728,37.431 R50.2@109.855,37.558
Net-(U3-SP1): C34.2 R49.2 U3.32 | length 5
  F.Cu w0.305: U3.32@107.158,33.177 107.158,34.734 108.458,36.034 C34.2@108.458,36.288 108.458,37.431 R49.2@108.331,37.558
Net-(U3-SP2): C36.2 R51.2 U3.30 | length 6.4
  F.Cu w0.305: U3.30@108.158,33.177 108.158,34.174 108.622,34.637 109.855,34.637 111.252,36.034 C36.2@111.252,36.288 111.252,37.431 R51.2@111.379,37.558
Net-(U3-VSENSE): R17.2 R18.1 U3.3 | length 12.1
  F.Cu w0.254: R18.1@88.9,24.604 88.9,23.461 89.154,23.207 91.694,23.207 94.996,26.509 95.885,26.509 96.157,26.238 U3.3@96.157,25.176
  F.Cu w0.305: R17.2@87.884,24.604 R18.1@88.9,24.604
Net-(U401-Rs): R402.1 U401.8 | length 3.1
  F.Cu w0.254: v1(84.9,12.4) 85.255,12.045 U401.8@86.133,12.045
  B.Cu w0.254: R402.1@83.312,12.666 84.634,12.666 v1(84.9,12.4)
NRST: C32.2 P2.5 U1.7 | length 32.6
  F.Cu w0.203: v1(93.472,7.459) 93.98,6.951 99.822,6.951 100.089,7.218 U1.7@100.089,8.186
  F.Cu w0.254: v1(99.187,12.269) 100.168,11.287 100.168,9.114 100.134,9.08 100.134,8.231 U1.7@100.089,8.186
  In2.Cu w0.254: v1(99.187,12.269) 100.187,12.269 102.997,15.079 105.078,15.079 107.694,12.463 110.006,12.463 112.289,14.747 113.38,14.747 P2.5@114.3,14.747
  B.Cu w0.203: v1(93.472,7.459) 93.726,7.713 C32.2@93.726,9.237
RX_SCL_MOSI: P3.6 U1.23 U1.29 U1.38 | length 41.6
  F.Cu w0.254: U1.38@102.088,19.687 102.088,18.783 101.473,18.168 101.473,16.904 101.473,16.759 v1(101.473,16.422) 101.473,16.222 102.235,15.46 104.123,15.46 ; U1.23@106.543,13.233 U1.23@106.589,13.187 105.74,13.187 105.029,13.898 105.029,14.747 104.315,15.46 104.123,15.46 ; U1.29@106.589,16.187 105.684,16.187 104.958,15.46 104.377,15.46 104.123,15.46
  In1.Cu w0.254: v1(101.473,16.422) 101.873,16.022 104.496,16.022 112.014,23.54 112.014,34.701 113.65,36.337 P3.6@114.3,36.987
SCK_ADC_EXT: P3.4 U1.21 | length 26.4
  F.Cu w0.254: v1(104.775,12.412) 105.001,12.186 U1.21@106.589,12.186
  In1.Cu w0.254: v1(104.775,12.412) 105.588,13.225 105.588,15.257 113.335,23.004 113.335,32.019 113.65,32.334 P3.4@114.3,32.984
SENS1: R23.2 R24.2 U1.16 | length 26.3
  F.Cu w0.254: U1.16@104.587,8.186 105.156,7.617 106.964,7.617 v1(107.061,7.713)
  In1.Cu w0.254: v1(91.3,16.75) 91.3,15.9 93.081,14.119 99.615,14.119 103.865,9.869 105.794,9.869 106.497,9.166 106.497,8.277 v1(107.061,7.713)
  B.Cu w0.254: R23.2@89.027,16.476 91.026,16.476 v1(91.3,16.75) R24.2@91.938,16.95
SENS2: R26.2 R27.2 U1.15 | length 28.6
  F.Cu w0.254: U1.15@104.089,8.186 104.089,9.09 104.364,9.364 105.285,9.364 v1(105.792,8.857)
  In1.Cu w0.254: v1(90.932,18.508) 89.789,18.508 89.281,18 89.281,17.309 92.902,13.688 99.436,13.688 104.266,8.857 v1(105.792,8.857)
  B.Cu w0.254: R26.2@89.027,18 89.535,18.508 v1(90.932,18.508) 91.88,18.508 R27.2@91.938,18.45
SENS3: R32.2 R33.2 U1.14 | length 30.2
  F.Cu w0.254: U1.14@103.589,8.186 103.589,6.958 v1(103.632,6.915)
  In1.Cu w0.254: v1(91.44,20.413) 90.874,20.413 88.773,18.312 88.773,17.206 92.723,13.256 99.243,13.256 103.632,8.867 v1(103.632,6.915)
  B.Cu w0.203: R32.2@89.012,19.55 89.412,19.95 R33.2@91.938,19.95
  B.Cu w0.254: v1(91.44,20.413) 91.938,20.331 R33.2@91.938,19.95
SERVO: C3.2 R5.1 U1.57 | length 18.1
  F.Cu w0.254: U1.57@95.087,13.687 101.578,13.687 102.659,14.768 103.899,14.768 103.911,14.757 v1(104.311,14.357)
  B.Cu w0.254: v1(104.311,14.357) 104.711,13.957 105.239,13.428 R5.1@106.426,13.428 107.251,13.428 109.728,13.428 C3.2@111.475,15.176
SH1_A: R48.1 R54.3 | length 24
  F.Cu w0.305: v1@105.313,39.082 v1(105.264,39.131) 106.758,39.131 R48.1@106.807,39.082
  In2.Cu w0.305: v1(90.424,35.78) 101.473,35.78 104.824,39.131 v1(105.264,39.131)
  B.Cu w0.254: R54.3@86.931,35.463 88.456,35.463 R54.3@88.519,35.399
  B.Cu w0.305: R54.3@86.931,35.463 87.82,35.463 R54.3@88.519,35.399 ; R54.3@87.63,35.463 90.106,35.463 v1(90.424,35.78)
SH1_B: R49.1 R54.4 | length 25
  F.Cu w0.305: v1(105.266,40.175) 107.861,40.175 108.331,39.705 R49.1@108.331,39.082
  In2.Cu w0.305: v1(89.789,36.542) 101.346,36.542 105.029,40.225 105.216,40.225 v1(105.266,40.175)
  B.Cu w0.254: R54.4@92.634,35.463 R54.4@93.408,35.463
  B.Cu w0.305: v1(89.789,36.542) 90.805,36.542 91.885,35.463 R54.4@92.71,35.463
SH2_A: R50.1 R53.4 | length 10.7
  F.Cu w0.305: R50.1@109.855,39.082 109.855,39.705 110.249,40.098 110.94,40.098 v1(111.506,40.098)
  B.Cu w0.305: R53.4@107.442,35.209 109.791,35.209 111.906,37.323 111.906,39.698 v1(111.506,40.098)
SH2_B: R51.1 R53.3 | length 11.4
  F.Cu w0.305: v1(111.03,38.454) 111.43,38.854 111.43,39.032 R51.1@111.379,39.082
  B.Cu w0.305: R53.3@102.362,35.209 103.188,35.209 104.14,36.161 109.728,36.161 111.03,37.463 v1(111.03,38.454)
SWCLK: P2.2 U1.49 | length 27.2
  F.Cu w0.254: U1.49@95.087,17.685 96.581,17.685 v1(96.901,17.365)
  In2.Cu w0.254: v1(96.901,17.365) 97.536,17.365 97.917,17.746 98.425,17.746 99.06,17.111 99.06,16.349 100.203,15.206 101.854,15.206 102.743,16.095 105.283,16.095 108.052,13.327 109.626,13.327 113.03,16.73 113.03,19.476 113.65,20.096 P2.2@114.3,20.746
SWDIO: P2.4 U1.46 | length 23.2
  F.Cu w0.254: U1.46@98.087,19.687 98.087,16.941 v1(98.171,16.857)
  In2.Cu w0.254: v1(98.171,16.857) 98.171,16.292 99.688,14.775 102.033,14.775 102.846,15.587 105.18,15.587 107.873,12.895 109.827,12.895 113.027,16.095 113.65,16.095 P2.4@114.3,16.746
TEMP_MOTOR: C4.2 P1.2 R7.1 U1.8 | length 22.4
  F.Cu w0.254: P1.2@84.1,7.8 85.404,6.496 100.256,6.496 100.589,6.829 U1.8@100.589,8.186
  B.Cu w0.254: C4.2@81.788,9.872 R7.1@83.312,9.872 83.312,8.589 P1.2@84.1,7.8
TX_SDA: P3.5 U1.20 U1.30 U1.37 | length 47.1
  F.Cu w0.203: v1@102.489,16.603 v1(102.489,16.844)
  F.Cu w0.254: v1@102.489,16.603 102.997,16.095 103.886,16.095 104.478,16.687 U1.30@106.589,16.687 ; v1(102.489,16.844) 102.489,17.111 102.588,17.21 U1.37@102.588,19.687 ; v1(103.632,12.793) 103.632,12.228 104.174,11.686 105.684,11.686 U1.20@106.589,11.686
  In1.Cu w0.254: v1(102.489,16.844) 102.089,17.244 101.225,17.244 100.711,16.73 100.711,15.968 100.711,15.46 ; v1(103.632,12.793) 103.378,12.793 100.711,15.46 ; P3.5@114.3,34.985 113.381,34.985 112.471,34.076 112.471,23.386 104.545,15.46 100.711,15.46
  B.Cu w0.406: P3.5@114.3,34.7 P3.5@114.3,34.97
unconnected-(P2-Pad6): P2.6
unconnected-(U1-PA15(JTDI)-Pad50): U1.50
unconnected-(U1-PB2-BOOT1-Pad28): U1.28
unconnected-(U1-PB3(JTDO{slash}TRACESWO)-Pad55): U1.55
unconnected-(U1-PB4(NJTRST)-Pad56): U1.56
unconnected-(U1-PC1(ADC123_IN11)-Pad9): U1.9
unconnected-(U1-PC3(ADC123_IN13)-Pad11): U1.11
unconnected-(U1-PC8-Pad39): U1.39
unconnected-(U1-PC9-Pad40): U1.40
unconnected-(U1-PC13_(RTC_AF1)-Pad2): U1.2
unconnected-(U1-PC14-OSC32_IN-Pad3): U1.3
unconnected-(U1-PC15-OSC32_OUT-Pad4): U1.4
unconnected-(U1-PD2-Pad54): U1.54
unconnected-(U3-EN_BUCK-Pad55): U3.55
unconnected-(U3-OCTW-Pad5): U3.5
unconnected-(U3-PWRGD-Pad4): U3.4
unconnected-(U3-SS_TR-Pad56): U3.56
unconnected-(U401-Vref-Pad5): U401.5
unconnected-(X1-Pad4): X1.4
USB_DM: R103.1 U1.44 | length 13.3
  F.Cu w0.254: R103.1@89.162,17.45 89.162,17.196 89.734,16.625 90.125,16.625 91.637,18.137 91.637,18.492 92.591,19.446 95.499,19.446 96.848,20.794 98.885,20.794 99.088,20.591 U1.44@99.088,19.687
USB_DP: R104.1 U1.45 | length 13
  F.Cu w0.254: R104.1@89.162,19 90.2,17.962 v1(90.2,17.7) ; U1.45@98.588,19.687 98.588,18.727 v1(98.85,18.35)
  In1.Cu w0.254: v1(90.2,17.7) 91.9,17.7 92.2,18 92.2,17.998 93.599,19.397 97.917,19.397 v1(98.85,18.35)
V_SUPPLY: C1.2 C8.2 C9.2 C37.2 C39.2 C40.2 C43.1 C44.1 C49.1 C51.2 J4.1 P4.1 Q1.D Q3.D Q5.D R3.1 U3.29 U3.53 U3.54 | length 290.3
  F.Cu w0.305: U3.54@96.157,33.177 96.329,33.177 96.393,33.113 96.456,33.177 U3.53@96.657,33.177 ; U3.29@108.656,33.177 108.656,31.645 109.347,30.954 C39.2@110.998,30.954
  F.Cu w0.406: C39.2@110.922,31.335 C39.2@110.998,30.954
  F.Cu w0.635: v2(80.01,36.034) v2(80.01,37.812) ; v2(80.01,39.59) 85.852,45.94 85.852,46.956 Q5.D@84.709,47.152 ; v2(81.788,36.034) v2(83.566,36.034) ; v2(81.788,37.812) v2(83.566,37.812) ; v2(81.788,39.59) v2(83.566,39.59) ; v1(93.98,31.589) 96.012,31.589 96.456,32.034 96.456,33.177 ; 96.393,33.113 96.393,31.208 v1(96.647,30.954) ; Q1.D@110.744,47.152 Q1.D@111.056,47.152
  F.Cu w0.889: Q1.D@110.744,47.152 113.596,47.152 v1(116.078,44.67)
  F.Cu w1.016: C37.2@88.229,39.082 C37.2@88.229,39.118 ; v1(93.98,31.589) 94.615,30.954 v1(96.647,30.954) ; C39.2@110.998,30.954 110.922,31.386 v1(111.125,31.589) ; Q1.D@111.31,47.152 Q1.D@110.744,47.152 ; v1(116.078,45.686) 112.21,45.686 Q1.D@110.744,47.152 ; v1(116.1,43.7) 112.648,47.152 Q1.D@110.744,47.152
  F.Cu w1.27: Q3.D@97.917,47.152 99.187,45.882 C8.2@99.187,41.495 C1.2@99.187,38.955
  F.Cu w2.286: v2(83.566,39.59) v2@84.074,39.082 ; Q3.D@97.917,47.152 99.187,45.882 C1.2@99.187,38.955
  F.Cu w5.08: v2(81.788,36.034) 81.788,44.231 Q5.D@84.709,47.152 ; v2(81.788,37.812) 81.788,38.828 90.112,47.152 Q3.D@97.917,47.152 ; Q5.D@84.709,47.152 87.815,50.258 92.202,50.258 95.308,47.152 Q3.D@97.917,47.152 ; Q5.D@84.709,47.152 Q3.D@97.917,47.152 ; Q3.D@97.917,47.152 107.5,47.152 104.648,50.004 100.769,50.004 Q3.D@97.917,47.152
  In1.Cu w1.016: v1(96.647,30.954) 97.917,30.954 100.457,28.414 108.458,28.414 111.125,31.081 v1(111.125,31.589) 111.125,33.547 ; v1(116.078,45.686) v1(116.078,44.67) 116.078,43.722 v1(116.1,43.7) 116.1,41.009 115.57,40.479 113.792,40.479 112.903,39.59 112.903,37.685 111.125,35.907 111.125,35.085 ; 111.125,33.547 111.125,33.667 111.05,33.742 v1(111.05,34.308) 111.05,34.874 111.125,34.949 111.125,35.085 ; 111.125,33.547 111.125,35.085
  In2.Cu w0.254: v1(83.9,19.7) 86.005,21.805 88.438,21.805 93.98,27.347 v1(93.98,31.589)
  In2.Cu w1.016: v1(111.125,31.589) 111.125,33.058 ; v1(116.078,45.686) v1(116.078,44.67) 116.123,44.625 116.123,44.289 116.1,44.266 v1(116.1,43.7) 116.1,42.763 116.078,42.741 116.078,40.987 115.57,40.479 113.817,40.479 112.903,39.566 112.903,36.161 112.014,35.273 ; 111.125,33.058 111.125,33.667 111.05,33.742 v1(111.05,34.308) 112.014,35.273 ; 111.125,33.058 111.125,34.383 112.014,35.273
  B.Cu w0.254: v1(83.9,19.7) 83.938,19.662 R3.1@85.2,19.662
  B.Cu w0.635: v2(80.01,36.034) v2(81.788,36.034) ; v2(80.01,37.812) v2(81.788,37.812) ; C43.1@92.329,32.732 92.837,32.732 v1(93.98,31.589) 93.98,30.573 94.488,30.065 C44.1@94.488,28.795 C49.1@94.488,26.382 ; v1(96.647,30.954) 97.047,30.554 ; 102.616,30.573 102.87,30.827 104.657,30.827 104.775,30.946 ; 105.257,30.946 105.851,30.351 C9.2@105.851,28.7
  B.Cu w0.889: 112.268,35.526 112.903,36.161 112.903,39.59 113.792,40.479 115.57,40.479 116.1,41.009 v1(116.1,43.7)
  B.Cu w1.016: v1(96.647,30.954) 97.047,30.554 102.489,30.554 ; 104.775,30.946 105.257,30.946 105.851,30.351 C9.2@105.851,28.7 109.47,28.7 C51.2@110.49,29.72 ; C51.2@111.201,30.431 C51.2@110.49,29.72 ; 112.268,35.526 v1(111.05,34.308) 109.982,33.24 ; v1(116.078,45.686) v1(116.078,44.67) 116.1,44.648 v1(116.1,43.7) ; C40.2@108.839,33.24 108.839,31.371 C51.2@110.49,29.72 ; C40.2@108.839,33.24 108.839,32.732 110.236,31.335 110.49,31.081 C51.2@110.49,29.72 ; C40.2@108.839,33.24 109.982,33.24 ; 109.982,33.24 109.982,32.732 v1(111.125,31.589) 111.125,30.355 C51.2@110.49,29.72
  other v2: 80.01,34.256 81.788,34.256 83.566,34.256 69.4,45.1 71,45.1 72.6,45.1 74.2,45.1 75.8,45.1 77.4,45.1 69.4,46.8 71,46.8 72.6,46.8 74.2,46.8 75.8,46.8 77.4,46.8
VCC: C10.2 C11.2 C12.2 C13.2 C14.2 C24.1 C25.1 C31.2 C35.2 C401.1 P2.1 P3.2 R1.1 R7.2 R11.2 R12.2 R13.2 R22.2 U1.1 U1.13 U1.19 U1.32 U1.48 U1.64 U2.2 U3.9 U3.24 U401.3 | length 185.2
  F.Cu w0.203: P3.2@114.3,28.971 115.316,29.987 115.316,40.479 114.3,41.495 R1.1@114.3,42.13
  F.Cu w0.254: U401.3@91.467,14.585 92.773,14.585 C401.1@93,14.812 93,15.25 v1(92.85,15.4) ; C13.2@93.218,18.635 C13.2@93.091,18.508 95.758,18.508 v1(95.85,18.6) 96.937,19.687 U1.48@97.089,19.687 ; U1.64@95.087,10.187 95.588,10.187 96.4,9.375 96.4,8.355 96.139,8.094 C35.2@96.139,7.84 96.744,7.84 U1.1@97.089,8.186 ; v1(95.631,7.84) C35.2@95.885,7.586 ; C12.2@98.552,23.08 98.552,23.461 99.157,24.066 U3.9@99.157,25.176 ; U1.13@103.088,8.186 103.088,9.09 103.998,9.999 105.283,9.999 105.644,9.638 106.801,9.638 v1(107.201,9.238) ; v1(106.045,18.567) 106.11,18.567 106.589,18.089 U1.32@106.589,17.685 ; U1.19@106.589,11.186 107.612,11.186 109.378,12.951 111.115,12.951 C11.2@111.664,12.951 v1(112.395,13.682) ; U3.24@106.657,25.176 106.657,17.754 U1.32@106.589,17.685 ; v1(109.135,17.515) 108.569,17.515 108.372,17.515 108.331,17.556 C10.2@108.331,18.127 107.889,17.685 U1.32@106.589,17.685
  F.Cu w0.508: v1(98.552,22.699) C12.2@98.552,23.08
  F.Cu w0.635: P2.1@114.3,22.748 112.903,24.145 112.903,27.652 114.221,28.971 P3.2@114.3,28.971
  In1.Cu w0.305: v1(95.85,18.6) 95.319,18.635 94.303,17.619 93.091,17.619 92.329,16.857 92.329,15.921 v1(92.85,15.4) 93.674,14.577 96.971,14.577 99.346,16.951 99.346,17.651 99.58,17.886 99.58,21.105 98.552,22.134 v1(98.552,22.699) ; v1(107.201,9.238) 107.201,9.804 111.079,13.682 111.829,13.682 v1(112.395,13.682) 112.395,14.248 112.395,14.255 v1(109.135,17.515) 109.135,17.583 P2.1@114.3,22.748
  B.Cu w0.254: R7.2@83.312,11.396 R13.2@84.836,11.396 84.836,10.888 85.09,10.634 ; R12.2@87.884,11.396 87.884,10.888 88.138,10.634 90.805,10.634 90.932,10.961 R11.2@90.932,11.596 ; v1(95.631,7.84) 101.727,7.84 104.775,10.888 C31.2@104.775,11.142 105.346,11.142 107.201,9.288 v1(107.201,9.238) ; v1(95.85,18.6) 95.977,18.727 C14.2@96.012,19.397 ; v1(106.045,18.567) 106.445,18.967 108.942,18.967 109.1,18.81 R22.2@109.1,18.238
  B.Cu w0.406: 80.264,17.2 80.264,11.142 80.772,10.634 85.09,10.634 88.138,10.634 90.932,10.634 ; 90.805,10.634 90.932,10.634 ; v1(95.631,7.84) 94.996,7.84 94.488,8.348 94.488,10.126 ; v1(95.85,18.6) 95.485,18.235 95.485,11.123 94.488,10.126 ; 90.932,10.634 93.98,10.634 94.488,10.126
  B.Cu w0.508: 80.264,17.2 80.264,19.54 C25.1@80.55,19.826 ; 90.932,10.961 R11.2@90.932,11.396
  B.Cu w0.635: C25.1@80.55,19.826 82.026,21.302 C24.1@85.09,21.302 86.36,21.302 87.695,22.638 87.695,25.305 86.364,26.636 U2.2@85.598,26.636 ; v1(91.2,25.6) 92.202,26.602 U2.2@92.202,26.636
  B.Cu w1.016: U2.2@85.598,26.636 86.536,26.636 88.4,28.5 90.338,28.5 U2.2@92.202,26.636
pads on no net: 1PIN.1 X1.Un1 X1.Un2

## Polygon pours and split planes (outlines as drawn)
H2_VS on F.Cu "F.Cu-/Mosfet driver/H2_VS" (solid, remove dead copper, pour order 29): 98.933,48.607 95.25,45.559 91.8,45.5 91.821,59.275 93.345,59.275 94.869,60.799 94.869,64.99 100.584,64.99 100.584,60.799 100.965,59.275 104.267,59.275 104.267,48.607
V_SUPPLY on F.Cu "F.Cu-V_SUPPLY" (solid, remove dead copper, pour order 28): 89.027,36.415 89.027,42.765 78.2,42.7 78.2,47.7 68.504,47.7 68.504,36.315
GND on F.Cu "F.Cu-GND-1" (solid, remove dead copper, pour order 27): 92.583,42.638 96.52,42.638 96.52,38.066 94.869,38.066 93.599,36.796 92.583,36.796
H1_VS on F.Cu "F.Cu-/Mosfet driver/H1_VS" (solid, remove dead copper, pour order 26): 117,50.961 104.6,50.961 104.648,59.275 106.68,59.275 106.68,64.99 117,65
H3_VS on F.Cu "F.Cu-/Mosfet driver/H3_VS" (solid, remove dead copper, pour order 25): 91.3,45.5 78.5,45.5 78.5,65 88.392,64.99 88.392,59.275 91.313,59.275
GND on F.Cu "F.Cu-GND" (solid, remove dead copper, pour order 23): 116.986,5.935 78.486,5.935 78.486,34.935 116.986,34.935
GND on In1.Cu "In1.Cu-GND-1" (solid, remove dead copper, pour order 34): 117,6 78.5,6 78.5,35 117,35
GND on In1.Cu "In1.Cu-GND" (solid, remove dead copper, pour order 33): 92.71,42.511 95.758,42.511 95.758,37.939 92.71,37.939
H1_VS on In1.Cu "In1.Cu-/Mosfet driver/H1_VS" (solid, remove dead copper, pour order 32): 117,45.5 113.919,45.432 110.871,48.607 104.648,48.607 104.648,59.275 106.68,59.275 106.68,64.99 117,65
H2_VS on In1.Cu "In1.Cu-/Mosfet driver/H2_VS" (solid, remove dead copper, pour order 31): 95.25,45.559 91.8,45.5 91.821,59.275 94.869,59.275 94.869,64.99 100.584,64.99 100.584,59.275 104.267,59.275 104.267,48.607 98.933,48.607
H3_VS on In1.Cu "In1.Cu-/Mosfet driver/H3_VS" (solid, remove dead copper, pour order 30): 91.3,45.5 78.5,45.5 78.5,65 88.392,64.99 88.392,59.275 91.313,59.275
H3_VS on In2.Cu "In2.Cu-/Mosfet driver/H3_VS" (solid, remove dead copper, pour order 39): 91.3,45.5 78.5,45.5 78.5,65 88.392,64.99 88.392,59.275 91.313,59.275
GND on In2.Cu "In2.Cu-GND-1" (solid, remove dead copper, pour order 38): 117,6 78.5,6 78.5,35 117,35
H2_VS on In2.Cu "In2.Cu-/Mosfet driver/H2_VS" (solid, remove dead copper, pour order 37): 104.267,45.559 91.8,45.5 91.821,59.275 94.869,59.275 94.869,64.99 100.584,64.99 100.584,59.275 104.267,59.275 104.267,48.607
H1_VS on In2.Cu "In2.Cu-/Mosfet driver/H1_VS" (solid, remove dead copper, pour order 36): 117,45.5 104.648,45.559 104.648,48.607 104.648,59.275 106.68,59.275 106.68,64.99 117,65
GND on In2.Cu "In2.Cu-GND" (solid, remove dead copper, pour order 35): 92.71,42.511 95.758,42.511 95.758,37.939 92.71,37.939
H2_VS on B.Cu "B.Cu-/Mosfet driver/H2_VS" (solid, remove dead copper, pour order 46): 95.377,48.607 91.927,48.548 91.821,59.275 94.869,59.275 94.869,74.99 100.584,74.99 100.584,59.275 104.267,59.275 104.267,48.607 98.933,48.607
V_SUPPLY on B.Cu "B.Cu-V_SUPPLY" (solid, remove dead copper, pour order 24): 68.5,47.7 68.5,33 78.2,33.1 78.2,47.7
GND on B.Cu "B.Cu-GND" (solid, remove dead copper, pour order 45): 117,6 78.5,6 78.5,12 68.5,12 68.5,31 78.5,31 78.5,35 94.996,35.018 94.996,36.923 92.71,36.923 92.71,47.845 100.838,47.845 100.838,42.003 101.727,42.003 101.727,36.923 100.33,36.923 100.33,35.018 117,35
H3_VS on B.Cu "B.Cu-/Mosfet driver/H3_VS" (solid, remove dead copper, pour order 44): 91.3,48.548 78.5,48.548 78.5,75 88.392,74.99 88.392,59.275 91.313,59.275
H1_VS on B.Cu "B.Cu-/Mosfet driver/H1_VS" (solid, remove dead copper, pour order 43): 117,45.5 113.919,45.432 110.871,48.607 104.648,48.607 104.648,59.275 106.68,59.275 106.68,74.99 117,75
H3_LOW on B.Cu "B.Cu-/Mosfet driver/H3_LOW" (solid, remove dead copper, pour order 42): 86.487,36.796 84.582,36.796 84.582,39.971 83.947,40.606 79.375,40.606 79.375,47.972 87.376,47.972 87.376,40.987 87.503,40.987
H1_LOW on B.Cu "B.Cu-/Mosfet driver/H1_LOW" (solid, remove dead copper, pour order 41): 113.411,42.892 112.649,42.892 112.649,42.257 110.363,39.971 110.363,37.685 109.22,36.542 106.426,36.542 106.426,47.845 110.871,47.845 113.411,45.305
VCC on B.Cu "B.Cu-VCC" (solid, remove dead copper, pour order 40): 93.3,23.9 84.2,23.9 84.2,29.7 93.3,29.7

## Keep-outs
Edge.Cuts:
  lines w0: 68.6,65.1 cw(c78.5,65.1) 78.5,75 117,75 117,0 111,0 111,5 ccw(c110,5) 110,6 85.5,6 ccw(c85.5,5) 84.5,5 84.5,0 78.6,0 cw(c78.518,9.9) 68.618,9.9 68.6,65.1
  lines w0.254: 68.6,65.1 cw(c78.5,65.1) 78.5,75 117,75 117,0 111,0 111,5 ccw(c110,5) 110,6 85.5,6 ccw(c85.5,5) 84.5,5 84.5,0 78.6,0 cw(c78.518,9.9) 68.618,9.9 68.6,65.1

## Silkscreen, mask and mechanical layers (free items; w line width, h text height)
F.SilkS:
  text "5v" at 84.45,31.212 h0.6 r90
  text "CANH" at 84.45,28.371 h0.6 r90
  text "CANL" at 84.45,25.599 h0.6 r90
  text "GND" at 84.45,23.585 h0.6 r90
  text "Benjamin Vedder" at 110.949,11.294 h1 r90
  text "VESC 4.12" at 109.235,9.676 h1 r90
  text "GND" at 113.924,5.824 h1
B.SilkS:
  text "vedder.se" at 87.7,60.266 h1.27
  text "MISO" at 112.337,40.74 h0.6 r90
  text "ADC2" at 116.401,40.296 h0.6 r90
  text "MOSI" at 112.337,38.207 h0.6 r90
  text "SCL" at 113.48,37.81 h0.6 r90
  text "RX" at 116.401,37.667 h0.6 r90
  text "SDA" at 113.48,35.804 h0.6 r90
  text "NSS" at 112.337,35.791 h0.6 r90
  text "TX" at 116.401,35.604 h0.6 r90
  text "ADC" at 116.401,33.916 h0.6 r90
  text "SCK" at 112.337,33.648 h0.6 r90
  text "GND" at 116.45,31.916 h0.6 r90
  text "3.3V" at 116.45,29.907 h0.6 r90
  text "5v" at 116.45,27.589 h0.6 r90
  text "3.3v" at 116.45,23.75 h0.6 r90
  text "CLK" at 116.45,21.653 h0.6 r90
  text "GND" at 116.45,19.716 h0.6 r90
  text "DIO" at 116.45,17.509 h0.6 r90
  text "RST" at 116.45,15.684 h0.6 r90
  text "5v" at 82.688,6.05 h0.6
  text "TEMP" at 85.235,6.05 h0.6
  text "H1" at 86.604,6.05 h0.6
  text "H2" at 88.733,6.05 h0.6
  text "H3" at 90.733,6.05 h0.6
  text "GND" at 93.016,6.05 h0.6
F.Mask:
  dashed: 106.68,51.02 106.68,44.67 103.124,44.67 103.124,52.544 104.902,52.544
  dashed: 94.234,51.02 94.234,43.4 92.71,43.4 92.71,44.924 90.932,44.924 89.662,43.654 89.662,52.798 92.456,52.798
  dashed: 88.9,36.415 84.074,36.415 84.074,33.748 79.375,33.748 79.375,43.273 88.9,43.273
  dashed: 87.63,56.227 80.518,56.227 80.518,59.402 82.55,60.799 82.55,64.228 87.63,64.228
  dashed: 112.014,60.672 112.395,60.418 113.665,59.402 113.665,56.227 106.553,56.227 106.553,59.275 106.934,60.672 106.934,64.228 112.014,64.228
  dashed: 100.33,60.164 100.838,59.402 100.838,56.227 93.726,56.227 93.726,59.275 95.377,60.291 95.377,64.228 100.33,64.228
B.Mask:
  dashed: 100.711,42.13 101.219,42.13 101.219,36.923 93.853,36.923 93.853,43.781 100.711,43.781
  dashed: 113.284,46.448 113.284,43.146 112.522,42.384 110.998,40.86 110.363,40.225 109.22,39.082 106.553,39.082 106.553,42.892 106.553,44.289 106.553,46.575 107.442,47.464 112.268,47.464
  dashed: 87.63,39.336 85.852,39.336 83.566,41.622 80.264,41.622 80.264,46.194 87.63,46.194

## Text inside footprints (layer, text, board x,y; h text height)
D4: B.SilkS "K" at 90.272,33.352 h1; B.SilkS "A" at 82.827,32.336 h1